# Altium PCB ExchangeDisplay2.PcbDoc (part 1 of 3)
Units mil, origin at the board's own origin, x right, y up, seen from the top; angles counter-clockwise.
Board outline 13550 x 7110 mil, 2 copper layers (Top Layer, Bottom Layer); 256 components, 104 nets, 668 pads, 97 vias.
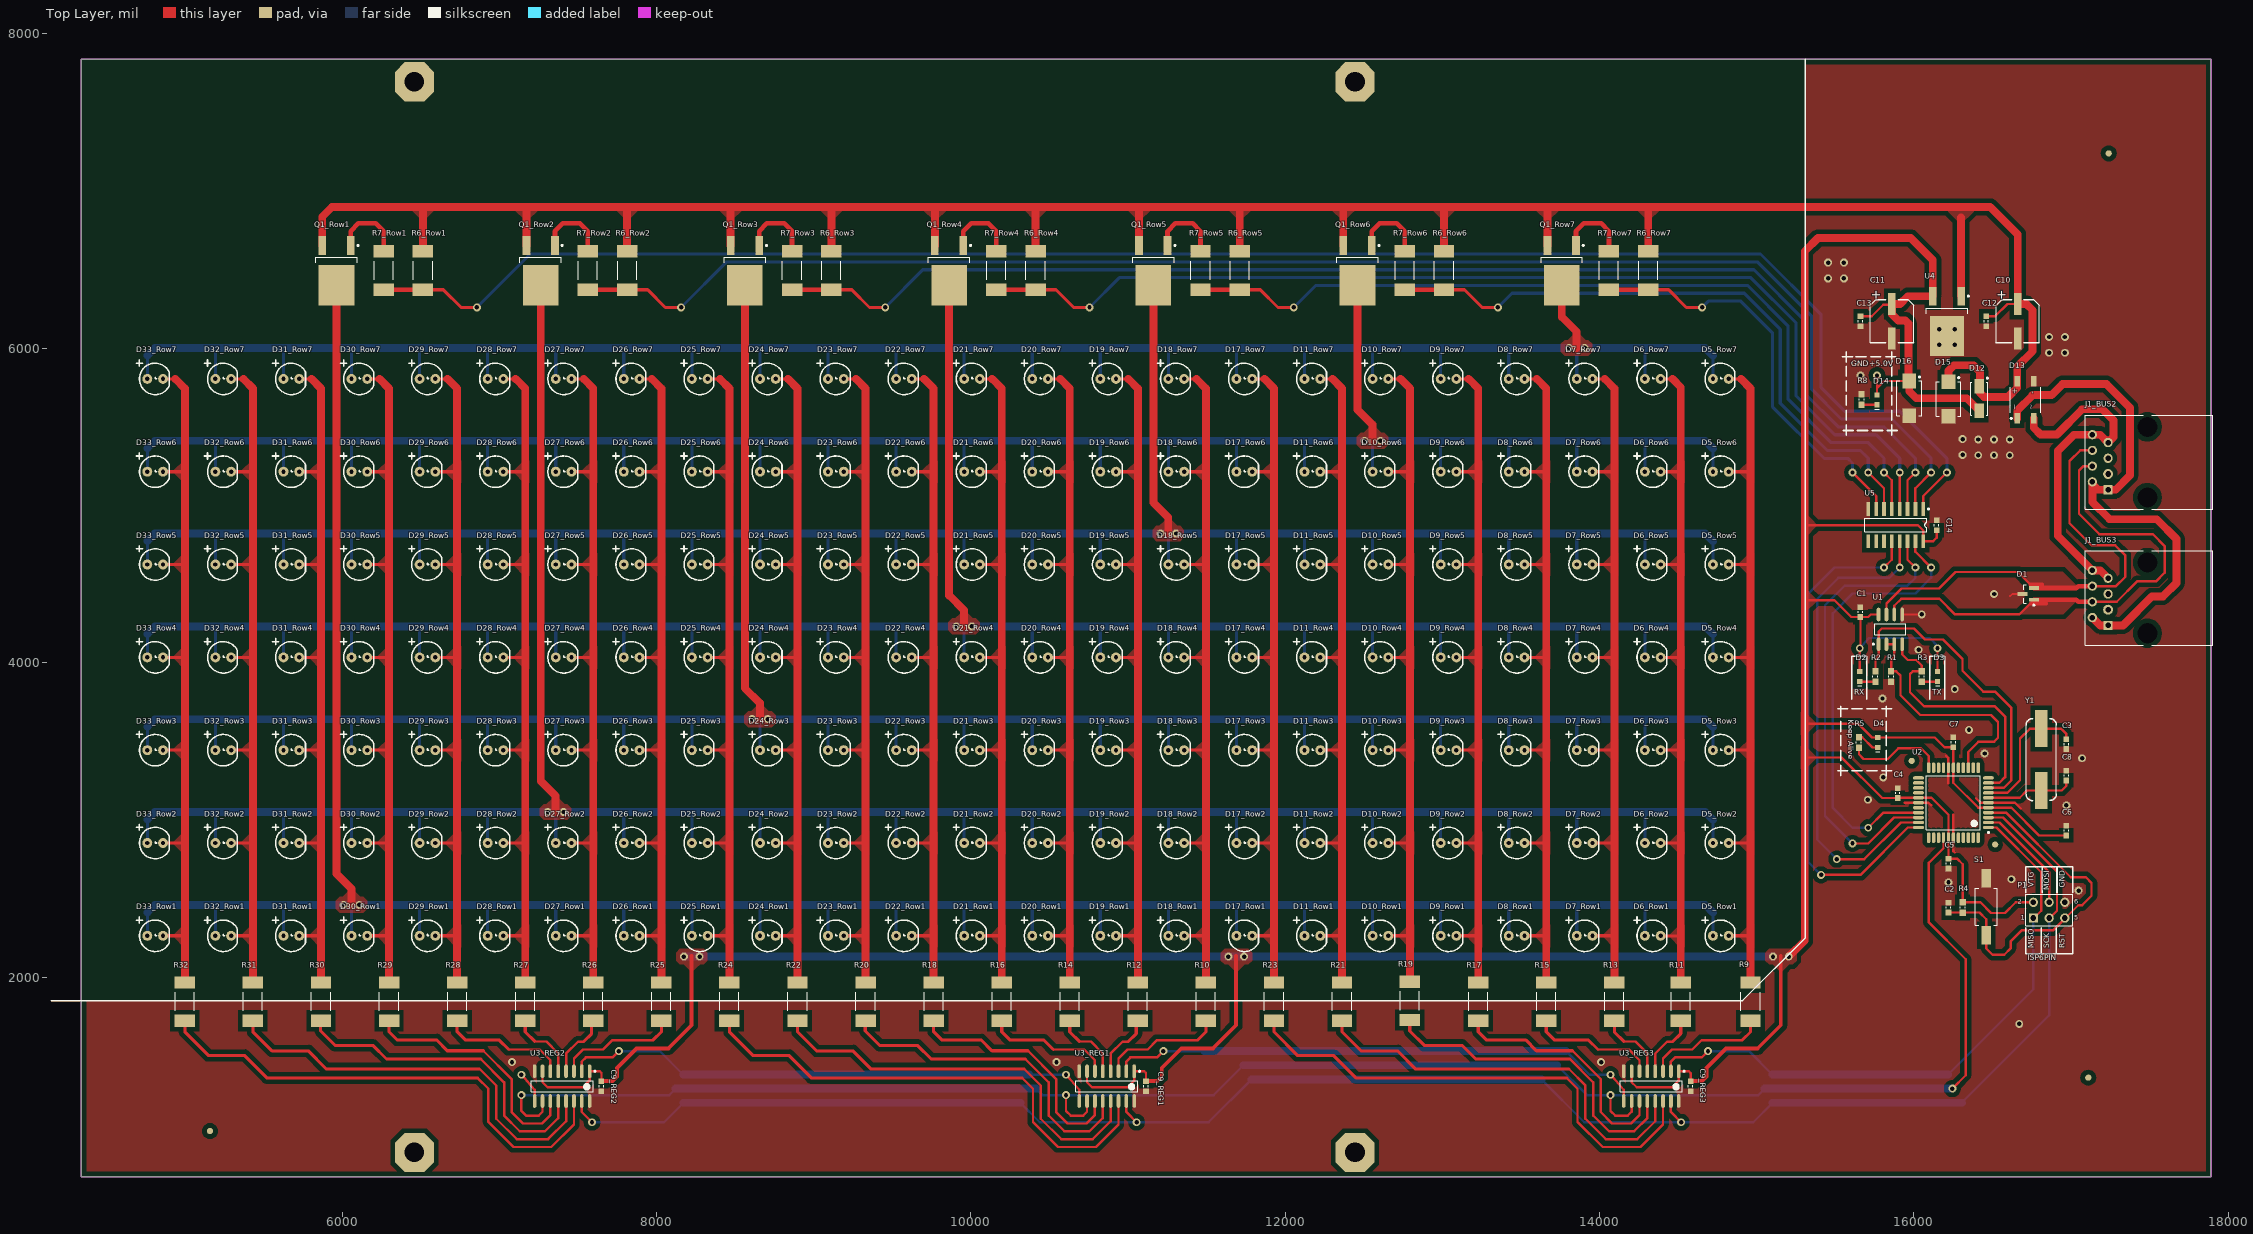
[diagram p0: Top Layer view]
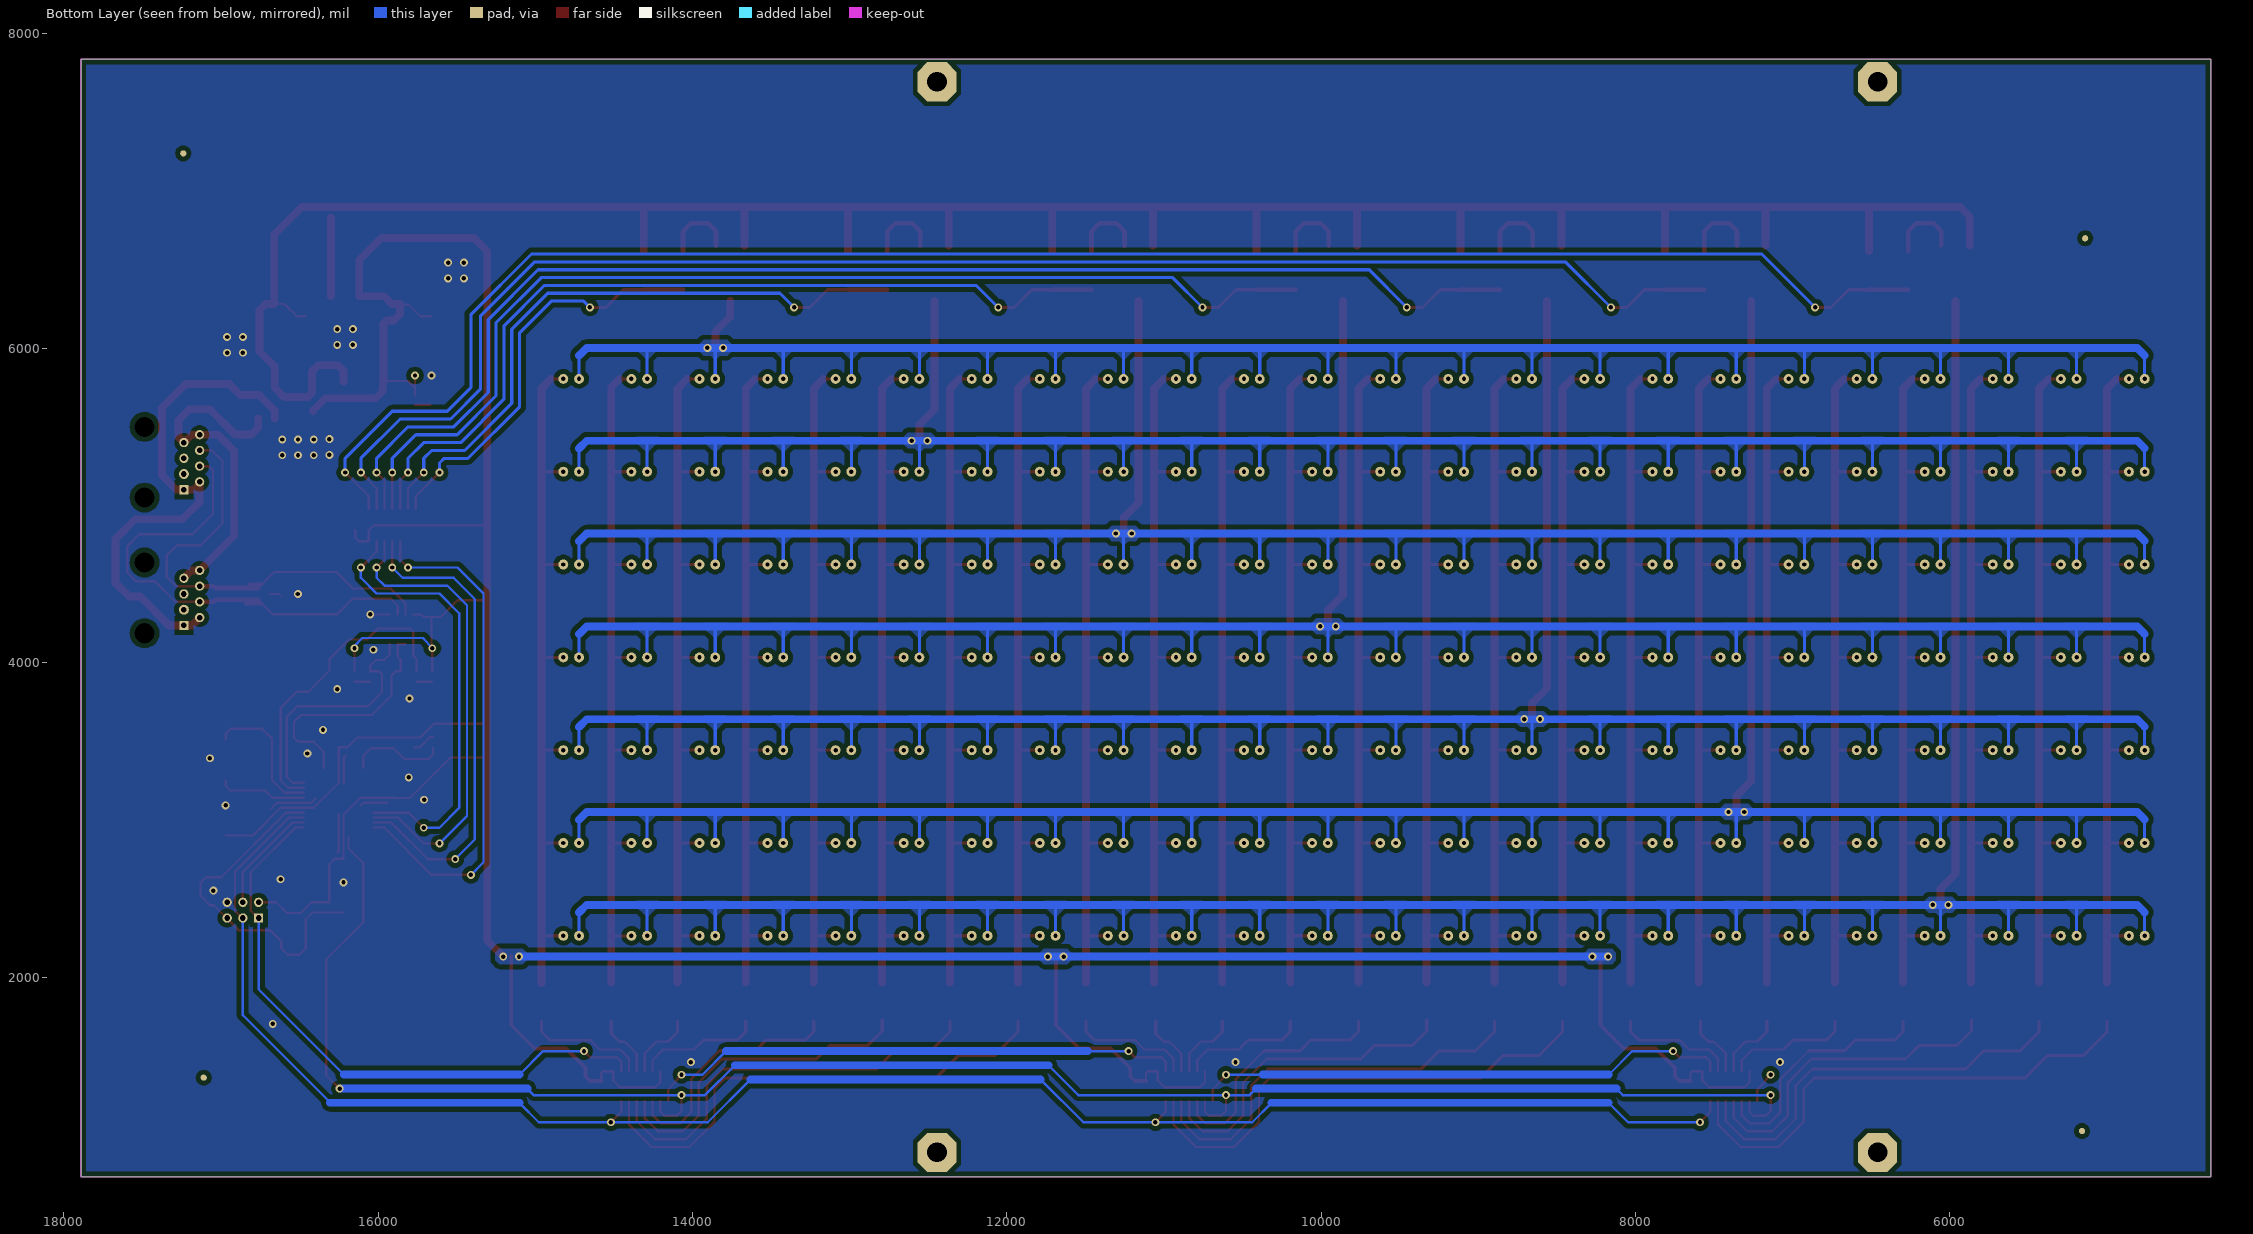
[diagram p1: Bottom Layer view, seen from below]

## Layer stack, top to bottom
Top Layer: signal copper 1.4
Dielectric: dielectric 12.6, FR-4, Dk 4.8
Bottom Layer: signal copper 1.4

## Board outline
17890,730 17890,7840 4340,7840 4340,730

## Design rules (kind name [scope] priority, off if disabled: settings)
Clearance [All] p1: gap=30
ComponentClearance [All] p1: gap=10 collisioncheckmode=3 verticalgap=10
PolygonConnect [All] p1: connectstyle=Direct reliefconductorwidth=10 reliefentries=4 polygonreliefangle="90 Angle"
RoomDefinition SUPPLY [InComponentClass('SUPPLY')] p1: confinementstyle=ConfineIn formatcopy=TRUE lockcomponents=FALSE outline 0,0 2000,0 2000,1000 0,1000
RoomDefinition RowCtrl [InComponentClass('RowCtrl')] p2: confinementstyle=ConfineIn formatcopy=TRUE lockcomponents=FALSE outline 0,0 2000,0 2000,1000 0,1000
RoomDefinition Row7 [InComponentClass('Row7')] p3: confinementstyle=ConfineIn formatcopy=TRUE lockcomponents=FALSE outline 0,0 2000,0 2000,1000 0,1000
RoomDefinition Row6 [InComponentClass('Row6')] p4: confinementstyle=ConfineIn formatcopy=TRUE lockcomponents=FALSE outline 0,0 2000,0 2000,1000 0,1000
RoomDefinition Row5 [InComponentClass('Row5')] p5: confinementstyle=ConfineIn formatcopy=TRUE lockcomponents=FALSE outline 0,0 2000,0 2000,1000 0,1000
RoomDefinition Row4 [InComponentClass('Row4')] p6: confinementstyle=ConfineIn formatcopy=TRUE lockcomponents=FALSE outline 0,0 2000,0 2000,1000 0,1000
RoomDefinition Row3 [InComponentClass('Row3')] p7: confinementstyle=ConfineIn formatcopy=TRUE lockcomponents=FALSE outline 0,0 2000,0 2000,1000 0,1000
RoomDefinition Row2 [InComponentClass('Row2')] p8: confinementstyle=ConfineIn formatcopy=TRUE lockcomponents=FALSE outline 0,0 2000,0 2000,1000 0,1000
RoomDefinition Row1 [InComponentClass('Row1')] p9: confinementstyle=ConfineIn formatcopy=TRUE lockcomponents=FALSE outline 0,0 2000,0 2000,1000 0,1000
RoomDefinition REG3 [InComponentClass('REG3')] p10: confinementstyle=ConfineIn formatcopy=TRUE lockcomponents=FALSE outline 0,0 2000,0 2000,1000 0,1000
RoomDefinition REG2 [InComponentClass('REG2')] p11: confinementstyle=ConfineIn formatcopy=TRUE lockcomponents=FALSE outline 0,0 2000,0 2000,1000 0,1000
RoomDefinition REG1 [InComponentClass('REG1')] p12: confinementstyle=ConfineIn formatcopy=TRUE lockcomponents=FALSE outline 0,0 2000,0 2000,1000 0,1000
RoomDefinition MATRIX [InComponentClass('MATRIX')] p13: confinementstyle=ConfineIn formatcopy=TRUE lockcomponents=FALSE outline 0,0 2000,0 2000,1000 0,1000
RoomDefinition CPU [InComponentClass('CPU')] p14: confinementstyle=ConfineIn formatcopy=TRUE lockcomponents=FALSE outline 0,0 2000,0 2000,1000 0,1000
RoomDefinition COM485 [InComponentClass('COM485')] p15: confinementstyle=ConfineIn formatcopy=TRUE lockcomponents=FALSE outline 0,0 2000,0 2000,1000 0,1000
RoomDefinition BUS3 [InComponentClass('BUS3')] p16: confinementstyle=ConfineIn formatcopy=TRUE lockcomponents=FALSE outline 0,0 2000,0 2000,1000 0,1000
RoomDefinition BUS2 [InComponentClass('BUS2')] p17: confinementstyle=ConfineIn formatcopy=TRUE lockcomponents=FALSE outline 0,0 2000,0 2000,1000 0,1000
RoutingVias [All] p1: holewidth=28 width=50 viastyle="Through Hole" minholewidth=28 minwidth=50 maxholewidth=28 maxwidth=50
SolderMaskExpansion [All] p1: expansion=4
TestPointUsage [All] p1: valid=0 allowmultiple=FALSE
Testpoint [All] p1: side=15 testpointundercomponent=TRUE minsize=40 maxsize=100 preferedsize=60 minholesize=0 maxholesize=40 preferedholesize=32 testpointgrid=1 style=1023 order=0123456789
Width RES [(InNet('RES11') OR InNet('RES12') OR InNet('RES13') OR InNet('RES14') OR InNet('RES15') OR InNet('RES16') OR InNet('RES17') OR InNet('RES18') OR  InNet('RES18'))] p1: maxlimit=50 minlimit=10 preferedwidth=20
Width [All] p2: maxlimit=50 minlimit=10 preferedwidth=15
18 further rules are at their usual default settings.

## Classes and differential pairs
channel class TPIC6B595_CommunicationInterface: REG1 REG2 REG3
channel class RowDotMatrix: Row1 Row2 Row3 Row4 Row5 Row6 Row7
channel class BUSConnector: BUS2 BUS3
component class SUPPLY: C10 C11 C12 C13 D12 D13 D14 D15 D16 R8 U4
component class RowCtrl: C14 U5
component class Row7: D5_Row7 D6_Row7 D7_Row7 D8_Row7 D9_Row7 D10_Row7 D11_Row7 D17_Row7 D18_Row7 D19_Row7 D20_Row7 D21_Row7 D22_Row7 D23_Row7 D24_Row7 D25_Row7 D26_Row7 D27_Row7 D28_Row7 D29_Row7 D30_Row7 D31_Row7 D32_Row7 D33_Row7 Q1_Row7 R6_Row7 R7_Row7
component class Row6: D5_Row6 D6_Row6 D7_Row6 D8_Row6 D9_Row6 D10_Row6 D11_Row6 D17_Row6 D18_Row6 D19_Row6 D20_Row6 D21_Row6 D22_Row6 D23_Row6 D24_Row6 D25_Row6 D26_Row6 D27_Row6 D28_Row6 D29_Row6 D30_Row6 D31_Row6 D32_Row6 D33_Row6 Q1_Row6 R6_Row6 R7_Row6
component class Row5: D5_Row5 D6_Row5 D7_Row5 D8_Row5 D9_Row5 D10_Row5 D11_Row5 D17_Row5 D18_Row5 D19_Row5 D20_Row5 D21_Row5 D22_Row5 D23_Row5 D24_Row5 D25_Row5 D26_Row5 D27_Row5 D28_Row5 D29_Row5 D30_Row5 D31_Row5 D32_Row5 D33_Row5 Q1_Row5 R6_Row5 R7_Row5
component class Row4: D5_Row4 D6_Row4 D7_Row4 D8_Row4 D9_Row4 D10_Row4 D11_Row4 D17_Row4 D18_Row4 D19_Row4 D20_Row4 D21_Row4 D22_Row4 D23_Row4 D24_Row4 D25_Row4 D26_Row4 D27_Row4 D28_Row4 D29_Row4 D30_Row4 D31_Row4 D32_Row4 D33_Row4 Q1_Row4 R6_Row4 R7_Row4
component class Row3: D5_Row3 D6_Row3 D7_Row3 D8_Row3 D9_Row3 D10_Row3 D11_Row3 D17_Row3 D18_Row3 D19_Row3 D20_Row3 D21_Row3 D22_Row3 D23_Row3 D24_Row3 D25_Row3 D26_Row3 D27_Row3 D28_Row3 D29_Row3 D30_Row3 D31_Row3 D32_Row3 D33_Row3 Q1_Row3 R6_Row3 R7_Row3
component class Row2: D5_Row2 D6_Row2 D7_Row2 D8_Row2 D9_Row2 D10_Row2 D11_Row2 D17_Row2 D18_Row2 D19_Row2 D20_Row2 D21_Row2 D22_Row2 D23_Row2 D24_Row2 D25_Row2 D26_Row2 D27_Row2 D28_Row2 D29_Row2 D30_Row2 D31_Row2 D32_Row2 D33_Row2 Q1_Row2 R6_Row2 R7_Row2
component class Row1: D5_Row1 D6_Row1 D7_Row1 D8_Row1 D9_Row1 D10_Row1 D11_Row1 D17_Row1 D18_Row1 D19_Row1 D20_Row1 D21_Row1 D22_Row1 D23_Row1 D24_Row1 D25_Row1 D26_Row1 D27_Row1 D28_Row1 D29_Row1 D30_Row1 D31_Row1 D32_Row1 D33_Row1 Q1_Row1 R6_Row1 R7_Row1
component class MATRIX: R9 R10 R11 R12 R13 R14 R15 R16 R17 R18 R19 R20 R21 R22 R23 R24 R25 R26 R27 R28 R29 R30 R31 R32
component class CPU: C2 C3 C4 C5 C6 C7 C8 D4 P1 R4 R5 S1 U2 Y1
component class COM485: C1 D1 D2 D3 R1 R2 R3 U1
component class BUS3: J1_BUS3
component class BUS2: J1_BUS2
component class REG1: C9_REG1 U3_REG1
component class REG2: C9_REG2 U3_REG2
component class REG3: C9_REG3 U3_REG3

## Components (designator, comment, footprint, x,y, rotation, side; value= is the part's Value field where it differs from the comment)
C1 "CAP0.1uF" CAP0603 15660,4322.05 r90 top
C2 "CAP0.1uF" CAP0603 16220.71,2442.05 r90 top
C3 "CAP18pF" CAP0603 16970.71,3482.05 r270 top
C4 "CAP0.1uF" CAP0603 15897.64,3170.67 r90 top
C5 "CAP0.1uF" CAP0603 16220.71,2722.05 r270 top
C6 "CAP0.1uF" CAP0603 16970.71,2932.05 r90 top
C7 "CAP0.1uF" CAP0603 16251.81,3493.54 r90 top
C8 "CAP18pF" CAP0603 16970.71,3282.05 r90 top
C9_REG1 "CAP0.1uF" CAP0603 11115.04,1305.99 r270 top (schematic designator C9)
C9_REG2 "CAP0.1uF" CAP0603 7650.47,1305.99 r270 top (schematic designator C9)
C9_REG3 "CAP0.1uF" CAP0603 14579.61,1305.98 r270 top (schematic designator C9)
C10 "CAP100uF" EEH-ZA1E101XP 16660.71,6172.05 r270 top
C11 "CAP47uF" EEH-ZA1E101XP 15860.71,6172.05 r270 top
C12 "CAP0.1uF" CAP0603 16460.71,6172.05 r270 top
C13 "CAP0.1uF" CAP0603 15660.71,6172.05 r270 top
C14 "CAP0.1uF" CAP0603 16145,4875 r90 top
D1 "SM712-02HTG" SW712 16727.87,4437.05 r180 top
D2 "LEDY" 150060YS75000 15655.71,3912.05 r90 top
D3 "LEDY" 150060YS75000 16150.71,3912.05 r90 top
D4 "LEDY" 150060YS75000 15770.71,3492.05 r90 top
D5_Row1 "Oval Led" LED 14722,2262.21 r0 top (schematic designator D5)
D5_Row2 "Oval Led" LED 14722,2852.76 r0 top (schematic designator D5)
D5_Row3 "Oval Led" LED 14722,3443.31 r0 top (schematic designator D5)
D5_Row4 "Oval Led" LED 14722,4033.86 r0 top (schematic designator D5)
D5_Row5 "Oval Led" LED 14722,4624.41 r0 top (schematic designator D5)
D5_Row6 "Oval Led" LED 14722.01,5214.96 r0 top (schematic designator D5)
D5_Row7 "Oval Led" LED 14722.01,5805.51 r0 top (schematic designator D5)
D6_Row1 "Oval Led" LED 14288.93,2262.21 r0 top (schematic designator D6)
D6_Row2 "Oval Led" LED 14288.93,2852.76 r0 top (schematic designator D6)
D6_Row3 "Oval Led" LED 14288.93,3443.31 r0 top (schematic designator D6)
D6_Row4 "Oval Led" LED 14288.93,4033.86 r0 top (schematic designator D6)
D6_Row5 "Oval Led" LED 14288.93,4624.41 r0 top (schematic designator D6)
D6_Row6 "Oval Led" LED 14288.93,5214.96 r0 top (schematic designator D6)
D6_Row7 "Oval Led" LED 14288.93,5805.51 r0 top (schematic designator D6)
D7_Row1 "Oval Led" LED 13855.86,2262.21 r0 top (schematic designator D7)
D7_Row2 "Oval Led" LED 13855.86,2852.76 r0 top (schematic designator D7)
D7_Row3 "Oval Led" LED 13855.86,3443.31 r0 top (schematic designator D7)
D7_Row4 "Oval Led" LED 13855.86,4033.86 r0 top (schematic designator D7)
D7_Row5 "Oval Led" LED 13855.86,4624.41 r0 top (schematic designator D7)
D7_Row6 "Oval Led" LED 13855.86,5214.96 r0 top (schematic designator D7)
D7_Row7 "Oval Led" LED 13855.86,5805.51 r0 top (schematic designator D7)
D8_Row1 "Oval Led" LED 13422.79,2262.21 r0 top (schematic designator D8)
D8_Row2 "Oval Led" LED 13422.79,2852.76 r0 top (schematic designator D8)
D8_Row3 "Oval Led" LED 13422.79,3443.31 r0 top (schematic designator D8)
D8_Row4 "Oval Led" LED 13422.79,4033.86 r0 top (schematic designator D8)
D8_Row5 "Oval Led" LED 13422.79,4624.41 r0 top (schematic designator D8)
D8_Row6 "Oval Led" LED 13422.8,5214.96 r0 top (schematic designator D8)
D8_Row7 "Oval Led" LED 13422.79,5805.51 r0 top (schematic designator D8)
D9_Row1 "Oval Led" LED 12989.72,2262.21 r0 top (schematic designator D9)
D9_Row2 "Oval Led" LED 12989.72,2852.76 r0 top (schematic designator D9)
D9_Row3 "Oval Led" LED 12989.72,3443.31 r0 top (schematic designator D9)
D9_Row4 "Oval Led" LED 12989.72,4033.86 r0 top (schematic designator D9)
D9_Row5 "Oval Led" LED 12989.72,4624.41 r0 top (schematic designator D9)
D9_Row6 "Oval Led" LED 12989.72,5214.96 r0 top (schematic designator D9)
D9_Row7 "Oval Led" LED 12989.72,5805.51 r0 top (schematic designator D9)
D10_Row1 "Oval Led" LED 12556.65,2262.21 r0 top (schematic designator D10)
D10_Row2 "Oval Led" LED 12556.65,2852.76 r0 top (schematic designator D10)
D10_Row3 "Oval Led" LED 12556.65,3443.31 r0 top (schematic designator D10)
D10_Row4 "Oval Led" LED 12556.65,4033.86 r0 top (schematic designator D10)
D10_Row5 "Oval Led" LED 12556.65,4624.41 r0 top (schematic designator D10)
D10_Row6 "Oval Led" LED 12556.65,5214.96 r0 top (schematic designator D10)
D10_Row7 "Oval Led" LED 12556.65,5805.51 r0 top (schematic designator D10)
D11_Row1 "Oval Led" LED 12123.57,2262.21 r0 top (schematic designator D11)
D11_Row2 "Oval Led" LED 12123.57,2852.76 r0 top (schematic designator D11)
D11_Row3 "Oval Led" LED 12123.57,3443.31 r0 top (schematic designator D11)
D11_Row4 "Oval Led" LED 12123.57,4033.86 r0 top (schematic designator D11)
D11_Row5 "Oval Led" LED 12123.57,4624.41 r0 top (schematic designator D11)
D11_Row6 "Oval Led" LED 12123.57,5214.96 r0 top (schematic designator D11)
D11_Row7 "Oval Led" LED 12123.57,5805.51 r0 top (schematic designator D11)
D12 "S1M-E3/5AT" S1M-E3/5AT 16415.71,5679.8 r270 top
D13 "MB6S-E3/80" MB6S-E3/80 16710.71,5672.05 r90 top
D14 "LEDY" 150060YS75000 15765.71,5672.05 r90 top
D15 "TVS12V" SMBJ5.0A 16220.71,5677.05 r270 top
D16 "TVS5.0V" SMBJ5.0A 15970.71,5681.81 r270 top
D17_Row1 "Oval Led" LED 11690.5,2262.21 r0 top (schematic designator D17)
D17_Row2 "Oval Led" LED 11690.5,2852.76 r0 top (schematic designator D17)
D17_Row3 "Oval Led" LED 11690.5,3443.31 r0 top (schematic designator D17)
D17_Row4 "Oval Led" LED 11690.5,4033.86 r0 top (schematic designator D17)
D17_Row5 "Oval Led" LED 11690.5,4624.41 r0 top (schematic designator D17)
D17_Row6 "Oval Led" LED 11690.5,5214.96 r0 top (schematic designator D17)
D17_Row7 "Oval Led" LED 11690.5,5805.51 r0 top (schematic designator D17)
D18_Row1 "Oval Led" LED 11257.43,2262.21 r0 top (schematic designator D18)
D18_Row2 "Oval Led" LED 11257.43,2852.76 r0 top (schematic designator D18)
D18_Row3 "Oval Led" LED 11257.43,3443.31 r0 top (schematic designator D18)
D18_Row4 "Oval Led" LED 11257.43,4033.86 r0 top (schematic designator D18)
D18_Row5 "Oval Led" LED 11257.43,4624.41 r0 top (schematic designator D18)
D18_Row6 "Oval Led" LED 11257.43,5214.96 r0 top (schematic designator D18)
D18_Row7 "Oval Led" LED 11257.43,5805.51 r0 top (schematic designator D18)
D19_Row1 "Oval Led" LED 10824.36,2262.21 r0 top (schematic designator D19)
D19_Row2 "Oval Led" LED 10824.36,2852.76 r0 top (schematic designator D19)
D19_Row3 "Oval Led" LED 10824.36,3443.31 r0 top (schematic designator D19)
D19_Row4 "Oval Led" LED 10824.36,4033.86 r0 top (schematic designator D19)
D19_Row5 "Oval Led" LED 10824.36,4624.41 r0 top (schematic designator D19)
D19_Row6 "Oval Led" LED 10824.36,5214.96 r0 top (schematic designator D19)
D19_Row7 "Oval Led" LED 10824.36,5805.51 r0 top (schematic designator D19)
D20_Row1 "Oval Led" LED 10391.29,2262.21 r0 top (schematic designator D20)
D20_Row2 "Oval Led" LED 10391.29,2852.76 r0 top (schematic designator D20)
D20_Row3 "Oval Led" LED 10391.29,3443.31 r0 top (schematic designator D20)
D20_Row4 "Oval Led" LED 10391.29,4033.86 r0 top (schematic designator D20)
D20_Row5 "Oval Led" LED 10391.29,4624.41 r0 top (schematic designator D20)
D20_Row6 "Oval Led" LED 10391.29,5214.96 r0 top (schematic designator D20)
D20_Row7 "Oval Led" LED 10391.29,5805.51 r0 top (schematic designator D20)
D21_Row1 "Oval Led" LED 9958.22,2262.21 r0 top (schematic designator D21)
D21_Row2 "Oval Led" LED 9958.22,2852.76 r0 top (schematic designator D21)
D21_Row3 "Oval Led" LED 9958.22,3443.31 r0 top (schematic designator D21)
D21_Row4 "Oval Led" LED 9958.22,4033.86 r0 top (schematic designator D21)
D21_Row5 "Oval Led" LED 9958.22,4624.41 r0 top (schematic designator D21)
D21_Row6 "Oval Led" LED 9958.22,5214.96 r0 top (schematic designator D21)
D21_Row7 "Oval Led" LED 9958.22,5805.51 r0 top (schematic designator D21)
D22_Row1 "Oval Led" LED 9525.15,2262.21 r0 top (schematic designator D22)
D22_Row2 "Oval Led" LED 9525.15,2852.76 r0 top (schematic designator D22)
D22_Row3 "Oval Led" LED 9525.15,3443.31 r0 top (schematic designator D22)
D22_Row4 "Oval Led" LED 9525.15,4033.86 r0 top (schematic designator D22)
D22_Row5 "Oval Led" LED 9525.15,4624.41 r0 top (schematic designator D22)
D22_Row6 "Oval Led" LED 9525.15,5214.96 r0 top (schematic designator D22)
D22_Row7 "Oval Led" LED 9525.15,5805.51 r0 top (schematic designator D22)
D23_Row1 "Oval Led" LED 9092.08,2262.21 r0 top (schematic designator D23)
D23_Row2 "Oval Led" LED 9092.08,2852.76 r0 top (schematic designator D23)
D23_Row3 "Oval Led" LED 9092.08,3443.31 r0 top (schematic designator D23)
D23_Row4 "Oval Led" LED 9092.08,4033.86 r0 top (schematic designator D23)
D23_Row5 "Oval Led" LED 9092.08,4624.41 r0 top (schematic designator D23)
D23_Row6 "Oval Led" LED 9092.08,5214.96 r0 top (schematic designator D23)
D23_Row7 "Oval Led" LED 9092.08,5805.51 r0 top (schematic designator D23)
D24_Row1 "Oval Led" LED 8659.01,2262.21 r0 top (schematic designator D24)
D24_Row2 "Oval Led" LED 8659.01,2852.76 r0 top (schematic designator D24)
D24_Row3 "Oval Led" LED 8659.01,3443.31 r0 top (schematic designator D24)
D24_Row4 "Oval Led" LED 8659.01,4033.86 r0 top (schematic designator D24)
D24_Row5 "Oval Led" LED 8659.01,4624.41 r0 top (schematic designator D24)
D24_Row6 "Oval Led" LED 8659.01,5214.96 r0 top (schematic designator D24)
D24_Row7 "Oval Led" LED 8659.01,5805.51 r0 top (schematic designator D24)
D25_Row1 "Oval Led" LED 8225.94,2262.21 r0 top (schematic designator D25)
D25_Row2 "Oval Led" LED 8225.94,2852.76 r0 top (schematic designator D25)
D25_Row3 "Oval Led" LED 8225.94,3443.31 r0 top (schematic designator D25)
D25_Row4 "Oval Led" LED 8225.94,4033.86 r0 top (schematic designator D25)
D25_Row5 "Oval Led" LED 8225.94,4624.41 r0 top (schematic designator D25)
D25_Row6 "Oval Led" LED 8225.94,5214.96 r0 top (schematic designator D25)
D25_Row7 "Oval Led" LED 8225.94,5805.51 r0 top (schematic designator D25)
D26_Row1 "Oval Led" LED 7792.87,2262.21 r0 top (schematic designator D26)
D26_Row2 "Oval Led" LED 7792.87,2852.76 r0 top (schematic designator D26)
D26_Row3 "Oval Led" LED 7792.87,3443.31 r0 top (schematic designator D26)
D26_Row4 "Oval Led" LED 7792.87,4033.86 r0 top (schematic designator D26)
D26_Row5 "Oval Led" LED 7792.87,4624.41 r0 top (schematic designator D26)
D26_Row6 "Oval Led" LED 7792.87,5214.96 r0 top (schematic designator D26)
D26_Row7 "Oval Led" LED 7792.87,5805.51 r0 top (schematic designator D26)
D27_Row1 "Oval Led" LED 7359.8,2262.21 r0 top (schematic designator D27)
D27_Row2 "Oval Led" LED 7359.8,2852.76 r0 top (schematic designator D27)
D27_Row3 "Oval Led" LED 7359.8,3443.31 r0 top (schematic designator D27)
D27_Row4 "Oval Led" LED 7359.8,4033.86 r0 top (schematic designator D27)
D27_Row5 "Oval Led" LED 7359.8,4624.41 r0 top (schematic designator D27)
D27_Row6 "Oval Led" LED 7359.8,5214.96 r0 top (schematic designator D27)
D27_Row7 "Oval Led" LED 7359.8,5805.51 r0 top (schematic designator D27)
D28_Row1 "Oval Led" LED 6926.72,2262.21 r0 top (schematic designator D28)
D28_Row2 "Oval Led" LED 6926.72,2852.76 r0 top (schematic designator D28)
D28_Row3 "Oval Led" LED 6926.72,3443.31 r0 top (schematic designator D28)
D28_Row4 "Oval Led" LED 6926.72,4033.86 r0 top (schematic designator D28)
D28_Row5 "Oval Led" LED 6926.72,4624.41 r0 top (schematic designator D28)
D28_Row6 "Oval Led" LED 6926.72,5214.96 r0 top (schematic designator D28)
D28_Row7 "Oval Led" LED 6926.72,5805.51 r0 top (schematic designator D28)
D29_Row1 "Oval Led" LED 6493.65,2262.21 r0 top (schematic designator D29)
D29_Row2 "Oval Led" LED 6493.65,2852.76 r0 top (schematic designator D29)
D29_Row3 "Oval Led" LED 6493.65,3443.31 r0 top (schematic designator D29)
D29_Row4 "Oval Led" LED 6493.65,4033.86 r0 top (schematic designator D29)
D29_Row5 "Oval Led" LED 6493.65,4624.41 r0 top (schematic designator D29)
D29_Row6 "Oval Led" LED 6493.65,5214.96 r0 top (schematic designator D29)
D29_Row7 "Oval Led" LED 6493.65,5805.51 r0 top (schematic designator D29)
D30_Row1 "Oval Led" LED 6060.58,2262.21 r0 top (schematic designator D30)
D30_Row2 "Oval Led" LED 6060.58,2852.76 r0 top (schematic designator D30)
D30_Row3 "Oval Led" LED 6060.58,3443.31 r0 top (schematic designator D30)
D30_Row4 "Oval Led" LED 6060.58,4033.86 r0 top (schematic designator D30)
D30_Row5 "Oval Led" LED 6060.58,4624.41 r0 top (schematic designator D30)
D30_Row6 "Oval Led" LED 6060.58,5214.96 r0 top (schematic designator D30)
D30_Row7 "Oval Led" LED 6060.58,5805.51 r0 top (schematic designator D30)
D31_Row1 "Oval Led" LED 5627.51,2262.21 r0 top (schematic designator D31)
D31_Row2 "Oval Led" LED 5627.51,2852.76 r0 top (schematic designator D31)
D31_Row3 "Oval Led" LED 5627.51,3443.31 r0 top (schematic designator D31)
D31_Row4 "Oval Led" LED 5627.51,4033.86 r0 top (schematic designator D31)
D31_Row5 "Oval Led" LED 5627.51,4624.41 r0 top (schematic designator D31)
D31_Row6 "Oval Led" LED 5627.51,5214.96 r0 top (schematic designator D31)
D31_Row7 "Oval Led" LED 5627.51,5805.51 r0 top (schematic designator D31)
D32_Row1 "Oval Led" LED 5194.44,2262.21 r0 top (schematic designator D32)
D32_Row2 "Oval Led" LED 5194.44,2852.76 r0 top (schematic designator D32)
D32_Row3 "Oval Led" LED 5194.44,3443.31 r0 top (schematic designator D32)
D32_Row4 "Oval Led" LED 5194.44,4033.86 r0 top (schematic designator D32)
D32_Row5 "Oval Led" LED 5194.44,4624.41 r0 top (schematic designator D32)
D32_Row6 "Oval Led" LED 5194.44,5214.96 r0 top (schematic designator D32)
D32_Row7 "Oval Led" LED 5194.44,5805.51 r0 top (schematic designator D32)
D33_Row1 "Oval Led" LED 4761.37,2262.21 r0 top (schematic designator D33)
D33_Row2 "Oval Led" LED 4761.37,2852.76 r0 top (schematic designator D33)
D33_Row3 "Oval Led" LED 4761.37,3443.31 r0 top (schematic designator D33)
D33_Row4 "Oval Led" LED 4761.37,4033.86 r0 top (schematic designator D33)
D33_Row5 "Oval Led" LED 4761.37,4624.41 r0 top (schematic designator D33)
D33_Row6 "Oval Led" LED 4761.37,5214.96 r0 top (schematic designator D33)
D33_Row7 "Oval Led" LED 4761.37,5805.51 r0 top (schematic designator D33)
J1_BUS2 "RJ45" 15-43-6233 17900.71,5275.43 r90 top (schematic designator J1)
J1_BUS3 "RJ45" 15-43-6233 17900.67,4412.05 r90 top (schematic designator J1)
P1 "ISP" HDR2X3 16760.71,2375.51 r0 top
Q1_Row1 "MJD117" MJD117 5964.72,6495 r270 top (schematic designator Q1)
Q1_Row2 "MJD117" MJD117 7263.94,6495 r270 top (schematic designator Q1)
Q1_Row3 "MJD117" MJD117 8563.15,6495 r270 top (schematic designator Q1)
Q1_Row4 "MJD117" MJD117 9862.36,6495 r270 top (schematic designator Q1)
Q1_Row5 "MJD117" MJD117 11161.57,6495 r270 top (schematic designator Q1)
Q1_Row6 "MJD117" MJD117 12460.79,6495 r270 top (schematic designator Q1)
Q1_Row7 "MJD117" MJD117 13760,6495 r270 top (schematic designator Q1)
R1 "RES4.7K" RES0603 15855.71,3912.05 r270 top
R2 "RES4.7K" RES0603 15755.71,3912.05 r90 top
R3 "RES4.7K" RES0603 16050.71,3912.05 r90 top
R4 "RES4.7K" RES0603 16310.71,2442.05 r90 top
R5 "RES4.7K" RES0603 15650.71,3492.05 r90 top
R6_Row1 "RES470" RES2512 6514.72,6495 r270 top (schematic designator R6)
R6_Row2 "RES470" RES2512 7813.94,6495 r270 top (schematic designator R6)
R6_Row3 "RES470" RES2512 9113.15,6495 r270 top (schematic designator R6)
R6_Row4 "RES470" RES2512 10412.36,6495 r270 top (schematic designator R6)
R6_Row5 "RES470" RES2512 11711.57,6495 r270 top (schematic designator R6)
R6_Row6 "RES470" RES2512 13010.79,6495 r270 top (schematic designator R6)
R6_Row7 "RES470" RES2512 14310,6495 r270 top (schematic designator R6)
R7_Row1 "RES470" RES2512 6264.72,6495 r90 top (schematic designator R7)
R7_Row2 "RES470" RES2512 7563.94,6495 r90 top (schematic designator R7)
R7_Row3 "RES470" RES2512 8863.15,6495 r90 top (schematic designator R7)
R7_Row4 "RES470" RES2512 10162.36,6495 r90 top (schematic designator R7)
R7_Row5 "RES470" RES2512 11461.57,6495 r90 top (schematic designator R7)
R7_Row6 "RES470" RES2512 12760.79,6495 r90 top (schematic designator R7)
R7_Row7 "RES470" RES2512 14060,6495 r90 top (schematic designator R7)
R8 "RES4.7K" RES0603 15667.68,5674.01 r90 top
R9 "RES470" RES2512 14960.63,1843.46 r270 top
R10 "RES470" RES2512 11496.06,1843.47 r270 top
R11 "RES470" RES2512 14517.4,1843.39 r270 top
R12 "RES470" RES2512 11062.99,1843.47 r270 top
R13 "RES470" RES2512 14094.49,1843.47 r270 top
R14 "RES470" RES2512 10629.92,1843.47 r270 top
R15 "RES470" RES2512 13661.42,1843.47 r270 top
R16 "RES470" RES2512 10196.85,1843.47 r270 top
R17 "RES470" RES2512 13228.35,1843.47 r270 top
R18 "RES470" RES2512 9763.78,1843.47 r270 top
R19 "RES470" RES2512 12793.15,1848.98 r270 top
R20 "RES470" RES2512 9330.71,1843.47 r270 top
R21 "RES470" RES2512 12362.2,1843.47 r270 top
R22 "RES470" RES2512 8897.64,1843.47 r270 top
R23 "RES470" RES2512 11929.13,1843.47 r270 top
R24 "RES470" RES2512 8464.57,1843.47 r270 top
R25 "RES470" RES2512 8031.5,1843.47 r270 top
R26 "RES470" RES2512 7598.42,1843.47 r270 top
R27 "RES470" RES2512 7165.35,1843.47 r270 top
R28 "RES470" RES2512 6732.28,1843.47 r270 top
R29 "RES470" RES2512 6299.21,1843.47 r270 top
R30 "RES470" RES2512 5866.14,1843.47 r270 top
R31 "RES470" RES2512 5433.07,1843.47 r270 top
R32 "RES470" RES2512 5000,1843.47 r270 top
S1 "SW-PB" microswitch 16460.71,2447.76 r90 top
U1 "MAX485CSA" NSO8_N 15850.71,4212.05 r90 top
U2 "ATmega1284P-AU" 44A_N 16251.81,3109.1 r180 top
U3_REG1 "POWER SHIFT REG" NPIC6C595_Q100_SOIC16 10865.04,1305.99 r270 top (schematic designator U3)
U3_REG2 "POWER SHIFT REG" NPIC6C595_Q100_SOIC16 7400.47,1305.99 r270 top (schematic designator U3)
U3_REG3 "POWER SHIFT REG" NPIC6C595_Q100_SOIC16 14329.61,1305.98 r270 top (schematic designator U3)
U4 "MC7805CDTRKG" MC7805CDTRKG 16210.71,6172.05 r270 top
U5 "SN74LS145DR" SOIC16 15885,4875 r180 top
Y1 "XTAL" Crystal20MHz 16810.71,3383.9 r90 top

## Footprints (in the part's own frame and the unit in brackets; to place one, negate y for a bottom-side part, rotate by r counter-clockwise, add the part's x,y. Pads: shape width x height; smd on the part's side, far side on the other; paste and mask are expansions set on the pad)
15-43-6233 [mm] "Connector; PCB Jack, Thru-Hole; 1-Port; Unshielded without Lightpipes; Right Angle"
  rect 1.5x1.5 hole 0.9: 1(-4.445,16.89)
  round 1.5 hole 0.9: 2(-3.175,19.43) 4(-0.635,19.43) 5(0.635,16.89) 6(1.905,19.43) 7(3.175,16.89) 8(4.445,19.43)
  round 1.6 hole 0.9: 3(-1.905,16.89)
  round 2.95 hole 3.25 unplated: MH1(-5.715,10.54) MH2(5.715,10.54)
  silkscreen extent -7.62,0 7.62,20.58
44A_N [mm] "Thin QFP, 44-Leads, Body 10x10mm, Pitch 0.8mm, IPC Medium Density"
  oval 1.75x0.55 smd: 1(-5.65,4) 2(-5.65,3.2) 3(-5.65,2.4) 4(-5.65,1.6) 5(-5.65,0.8) 6(-5.65,0) 7(-5.65,-0.8) 8(-5.65,-1.6) 9(-5.65,-2.4) 10(-5.65,-3.2) 11(-5.65,-4) 23(5.65,-4) 24(5.65,-3.2) 25(5.65,-2.4) 26(5.65,-1.6) 27(5.65,-0.8) 28(5.65,0) 29(5.65,0.8) 30(5.65,1.6) 31(5.65,2.4) 32(5.65,3.2) 33(5.65,4)
  oval 0.55x1.75 smd: 12(-4,-5.65) 13(-3.2,-5.65) 14(-2.4,-5.65) 15(-1.6,-5.65) 16(-0.8,-5.65) 17(0,-5.65) 18(0.8,-5.65) 19(1.6,-5.65) 20(2.4,-5.65) 21(3.2,-5.65) 22(4,-5.65) 34(4,5.65) 35(3.2,5.65) 36(2.4,5.65) 37(1.6,5.65) 38(0.8,5.65) 39(0,5.65) 40(-0.8,5.65) 41(-1.6,5.65) 42(-2.4,5.65) 43(-3.2,5.65) 44(-4,5.65)
  silkscreen extent -5.77,-4.35 4.35,4.95, body extent -5,-5 5,5, height 1.2
150060YS75000 [mm]
  rect 0.85x0.85 smd: 1(-0.8,0) 2(0.8,0)
  silkscreen extent -1.53,-0.33 -1.53,0.33, body extent -0.85,-0.45 0.85,0.45, height 2.44
CAP0603 [mm] "Capacitores cerámicos de capas múltiples (MLCC) - SMD/SMT 0603 0.1uF 16volts X7R 5%"
  rect 0.9x0.9 smd: 1(-0.8,0) 2(0.8,0)
  silkscreen extent -0.15,-0.35 0.15,0.35, body extent -0.83,-0.43 0.82,0.42, height 0.85
Crystal20MHz [mm]
  rect 6x2 smd: 1(-5,0) 2(5,0)
  silkscreen extent -6.64,-2.45 6.6,2.45, body extent -6.6,-2.4 6.6,2.4, height 4.3
EEH-ZA1E101XP [mm] "EEH-ZA1E101XP"
  rect 3.5x1.2 smd: 1(-2.794,0) 2(2.794,0)
  silkscreen extent -3.5,-3.5 3.5,3.5
HDR2X3 [mm] "Connector; Header; 3x2 Position"
  rect 1.5x1.5 hole 0.9: 1(0,0)
  round 1.5 hole 0.9: 2(0,2.54) 3(2.54,0) 4(2.54,2.54) 5(5.08,0) 6(5.08,2.54)
  silkscreen extent -1.27,-1.27 6.35,3.81
LED [mm]
  round 1.6 hole 0.711: A(0,0) K(2.54,0)
  silkscreen extent -1.78,-2.54 3.56,3.05
MB6S-E3/80 [mm] "MB6S-E3/80"
  rect 1.7x0.85 smd: 1(-3,1.335) 2(-3,-1.335) 3(3,-1.335) 4(3,1.335)
  silkscreen extent -3.12,-2.45 2.05,2.45, body extent -2.05,-2.47 2.05,2.48, height 2.9
MC7805CDTRKG [mm] "MC7805CDTRKG"
  rect 3.05x1.25 smd: 1(-4.05,2.29) 3(-4.05,-2.29)
  rect 6.5x5.55 smd: 4(2.4,0)
  silkscreen extent -4.17,-3.35 -1.25,3.59, body extent -2.5,-3.37 3.72,3.37, height 2.38
microswitch [mm]
  rect 3x1.6 smd: 1(-4.59,0) 2(4.59,0)
  silkscreen extent -3,-1.75 3,1.75, body extent -3,-1.75 3,1.75, height 4.57
MJD117 [mm]
  rect 3.05x1.25 smd: 1(-4.05,2.3) 3(-4.05,-2.3)
  rect 6.5x5.75 smd: 2(2.4,0)
  silkscreen extent -4.17,-3.35 -1.25,3.6, body extent -2.5,-3.37 3.72,3.37, height 2.38
NPIC6C595_Q100_SOIC16 [mm]
  oval 2.2x0.6 smd: 1(-2.4,4.445) 2(-2.4,3.175) 3(-2.4,1.905) 4(-2.4,0.635) 5(-2.4,-0.635) 6(-2.4,-1.905) 7(-2.4,-3.175) 8(-2.4,-4.445) 9(2.4,-4.445) 10(2.4,-3.175) 11(2.4,-1.905) 12(2.4,-0.635) 13(2.4,0.635) 14(2.4,1.905) 15(2.4,3.175) 16(2.4,4.445)
  silkscreen extent -2.52,-5 0.9,5.42, body extent -2,-5 2,5, height 1.75
NSO8_N [mm] "SOIC, 8-Leads, Body 4.9x3.9mm, Pitch 1.27mm, IPC Medium Density"
  oval 2.2x0.6 smd: 1(-2.4,1.905) 2(-2.4,0.635) 3(-2.4,-0.635) 4(-2.4,-1.905) 5(2.4,-1.905) 6(2.4,-0.635) 7(2.4,0.635) 8(2.4,1.905)
  silkscreen extent -2.52,-2.5 0.9,2.88, body extent -1.95,-2.45 1.95,2.45, height 1.75
RES0603 [mm]
  rect 1x1 smd: 1(-0.85,0) 2(0.85,0)
  silkscreen extent -0.15,-0.4 0.15,0.4, body extent -0.9,-0.45 0.9,0.45, height 0.55
RES2512 [mm]
  rect 2x3.3 smd: 1(-3.1,0) 2(3.1,0)
  silkscreen extent -1.5,-1.55 1.5,1.55, body extent -3.15,-1.58 3.15,1.57, height 0.7
S1M-E3/5AT [mm] "S1M-E3/5AT"
  rect 2.35x1.55 smd: 1(-1.975,0) 2(1.975,0)
  silkscreen extent -3.42,-1.4 2.65,1.45, body extent -2.64,-1.4 2.64,1.39, height 2.29
SMBJ5.0A [mm]
  rect 2.35x2.2 smd: 1(-2.8,0) 2(2.8,0)
  silkscreen extent -3.57,-2 2.8,2, body extent -2.8,-1.97 2.79,1.97, height 2.44
SOIC16 [mm] "Small Outline; 16 Leads; Body Width 3.9 mm; Pitch 1.27 mm"
  rect 0.6x2.2 smd: 1(-4.445,-2.6) 2(-3.175,-2.6) 3(-1.905,-2.6) 4(-0.635,-2.6) 5(0.635,-2.6) 6(1.905,-2.6) 7(3.175,-2.6) 8(4.445,-2.6) 9(4.445,2.6) 10(3.175,2.6) 11(1.905,2.6) 12(0.635,2.6) 13(-0.635,2.6) 14(-1.905,2.6) 15(-3.175,2.6) 16(-4.445,2.6)
  silkscreen extent -5.42,-2.72 5,1.1
SW712 [mm] "SM712 Series 600W Asymmetrical TVS Diode Array"
  rect 1.6x0.6 smd: 1(-0.9,0.95) 2(-0.9,-0.95) 3(0.9,0)
  silkscreen extent -1.03,-1.5 0.7,1.92, body extent -0.7,-1.52 0.7,1.52, height 1.12

## Part data
C1 C2 C4 C5 C6 C7 C9_REG1 C9_REG2 C9_REG3 C12 C13 C14: library part C0.1UF, "Capacitores cerámicos de capas múltiples (MLCC) - SMD/SMT 0603 0.1uF 16volts X7R 5%"
C3 C8: "Capacitores cerámicos de capas múltiples (MLCC) - SMD/SMT 0603 18pF 50volts C0G 5%"
C10: "Capacitores de polímero orgánico de aluminio 100uF 25volts 6.3x7.7mm"
C11: "Capacitores de polímero orgánico de aluminio 25volts 47uF ESR 30mohm"
D1: "Secuencias de diodos de TVS 600W 2 Channel Green Asymmetrical SOT23-3 (- 7 V to + 12 V)"
D2 D3 D4 D14: "LED estándar - SMD (montaje superficial) WL-SMCW SMDMono TpVw Waterclr 0603 Yellow"
D5_Row1 D5_Row2 D5_Row3 D5_Row4 D5_Row5 D5_Row6 D5_Row7 D6_Row1 D6_Row2 D6_Row3 D6_Row4 D6_Row5 D6_Row6 D6_Row7 D7_Row1 D7_Row2 D7_Row3 D7_Row4 D7_Row5 D7_Row6 D7_Row7 D8_Row1 D8_Row2 D8_Row3 D8_Row4 D8_Row5 D8_Row6 D8_Row7 D9_Row1 D9_Row2 D9_Row3 D9_Row4 D9_Row5 D9_Row6 D9_Row7 D10_Row1 D10_Row2 D10_Row3 D10_Row4 D10_Row5 D10_Row6 D10_Row7 D11_Row1 D11_Row2 D11_Row3 D11_Row4 D11_Row5 D11_Row6 D11_Row7 D17_Row1 D17_Row2 D17_Row3 D17_Row4 D17_Row5 D17_Row6 D17_Row7 D18_Row1 D18_Row2 D18_Row3 D18_Row4 D18_Row5 D18_Row6 D18_Row7 D19_Row1 D19_Row2 D19_Row3 D19_Row4 D19_Row5 D19_Row6 D19_Row7 D20_Row1 D20_Row2 D20_Row3 D20_Row4 D20_Row5 D20_Row6 D20_Row7 D21_Row1 D21_Row2 D21_Row3 D21_Row4 D21_Row5 D21_Row6 D21_Row7 D22_Row1 D22_Row2 D22_Row3 D22_Row4 D22_Row5 D22_Row6 D22_Row7 D23_Row1 D23_Row2 D23_Row3 D23_Row4 D23_Row5 D23_Row6 D23_Row7 D24_Row1 D24_Row2 D24_Row3 D24_Row4 D24_Row5 D24_Row6 D24_Row7 D25_Row1 D25_Row2 D25_Row3 D25_Row4 D25_Row5 D25_Row6 D25_Row7 D26_Row1 D26_Row2 D26_Row3 D26_Row4 D26_Row5 D26_Row6 D26_Row7 D27_Row1 D27_Row2 D27_Row3 D27_Row4 D27_Row5 D27_Row6 D27_Row7 D28_Row1 D28_Row2 D28_Row3 D28_Row4 D28_Row5 D28_Row6 D28_Row7 D29_Row1 D29_Row2 D29_Row3 D29_Row4 D29_Row5 D29_Row6 D29_Row7 D30_Row1 D30_Row2 D30_Row3 D30_Row4 D30_Row5 D30_Row6 D30_Row7 D31_Row1 D31_Row2 D31_Row3 D31_Row4 D31_Row5 D31_Row6 D31_Row7 D32_Row1 D32_Row2 D32_Row3 D32_Row4 D32_Row5 D32_Row6 D32_Row7 D33_Row1 D33_Row2 D33_Row3 D33_Row4 D33_Row5 D33_Row6 D33_Row7: library part HBLED, "HBLED"
D12: "Rectificadores 1.0 Amp 1000 Volt 30A IFSM @ 8.3ms"
D13: "Rectificadores en puente 600 Volt 0.5 Amp 35 Amp IFSM"
D15: "Diodos TVS - Supresores de tensión transitoria 600W 12V 5% Uni"
D16: "Diodos TVS - Supresores de tensión transitoria 5Vr 600W 65.3A 5% UniDirectional"
J1_BUS2 J1_BUS3: library part 15-43-6233, "Conectores modulares / Conectores Ethernet 8 PCB LO PRO R/A"
P1: library part "Header 3X2", "Alojamientos de cables y cabecera 2X03P DUAL ROW"
Q1_Row1 Q1_Row2 Q1_Row3 Q1_Row4 Q1_Row5 Q1_Row6 Q1_Row7: "Transistores Darlington PNP Silicon Darl"
R1 R2 R3 R4 R5 R8: "Resistores de película gruesa - SMD 1/10watt 4.7Kohms 1%"
R6_Row1 R6_Row2 R6_Row3 R6_Row4 R6_Row5 R6_Row6 R6_Row7 R7_Row1 R7_Row2 R7_Row3 R7_Row4 R7_Row5 R7_Row6 R7_Row7 R9 R10 R11 R12 R13 R14 R15 R16 R17 R18 R19 R20 R21 R22 R23 R24 R25 R26 R27 R28 R29 R30 R31 R32: "Resistores de película gruesa - SMD 1watt 470ohms 5%"
S1: "Switch"
U1: "Low-Power, Slew-Rate-Limited RS-485/RS-422 Transceiver"
U2: "20 MHz 8-bit AVR Microcontroller with 128KB Flash, 44-Pin TQFP Pkg, Industrial Temp"
U3_REG1 U3_REG2 U3_REG3: library part "TPIC6C595DR / NPIC6C595D", "Registros de cambio de contadores 8bit Shift"
U4: "Reguladores de tensión lineal 5V 1A Postive"
U5: "Codificadores, decodificadores, multiplexores y demultiplexores BCD-To-Decimal Decoders/Drivers"
Y1: "Cristales 20MHz 16pF -10C +70C"

## Free pads (board coordinates)
  oct 250x250 hole 125: 0(6460.67,884.25) 0(6460.67,7695.28) 0(12444.92,884.25) 0(12444.92,7695.28)
  round 250 hole 125: 0(11117.36,20196.85) 0(11117.36,27007.87) 0(17101.61,20196.85) 0(17101.61,27007.87) 0(31889.76,19586.61) 0(31889.76,26397.64) 0(37874.02,19601.61) 0(37874.02,26397.64)
  round 39.37 smd far side mask+39.37: 1(5140,6700) 1(5160,1020) 1(17110,1360) 1(17240,7240)
  round 39.37 smd mask+39.37: 1(5160,1020) 1(17110,1360) 1(17240,7240)
  round 39.37 smd mask+29.53: 1(15986.69,3375.04) 1(16517.72,2843.03)

## Via types
v1: diameter 50, hole 28, Top Layer to Bottom Layer, 96 vias
v2: diameter 50, hole 27.99, Top Layer to Bottom Layer, 1 vias

## Nets (pads, with @x,y where several pads share a name; then routed paths per layer and width w, separated by ;. In a path a pad name is that pad's centre, name@x,y a point inside that pad or via, vN(x,y) a via of type N, cw(c..) or ccw(c..) an arc to the next point about the centre after c; other vN are vias at no path point)
20MHZ_1: C3.1 U2.8 Y1.2 | length 866.9
  Top Layer w15: U2.8@16474.25,3172.09 16595.75,3172.09 16675.71,3252.05 16675.71,3517.05 16737.56,3578.9 16938.86,3578.9 16970.71,3547.05 C3.1@16970.71,3513.54
20MHZ_2: C8.1 U2.7 Y1.1 | length 561.6
  Top Layer w15: U2.7@16474.25,3140.59 16674.25,3140.59 16720.71,3187.05 Y1.1@16810.71,3187.05 16940.71,3187.05 16970.71,3217.05 C8.1@16970.71,3250.55
A: D1.1 J1_BUS2.4 J1_BUS3.4 U1.6 | length 3210.3
  Top Layer w15: U1.6@15875.71,4306.54 15875.71,4362.05 15920.71,4407.05 16162.87,4407.05 16262.87,4307.05 16670.71,4307.05 D1.1@16763.31,4399.65 ; J1_BUS2.4@17123.54,5250.43 17079.09,5250.43 17050.71,5222.05 17050.71,4947.05 17180.71,4817.05 17520.71,4817.05 17595.71,4742.05 17595.71,4572.05 17540.71,4517.05 17420.71,4517.05 17290.71,4387.05 J1_BUS3.4@17133.64,4387.05
  Top Layer w25: 16745.71,4377.04 16840.71,4377.04
  Top Layer w30: D1.1@16763.31,4399.65 17033.15,4399.65 17045.75,4387.05 J1_BUS3.4@17133.64,4387.05
B: D1.2 J1_BUS2.6 J1_BUS3.6 U1.7 | length 2920
  Top Layer w15: U1.7@15825.71,4306.54 15825.71,4377.05 15920.71,4472.05 16160.71,4472.05 16265.71,4577.05 16660.71,4577.05 16740.71,4497.05 ; J1_BUS2.6@17123.54,5350.43 17059.09,5350.43 16990.71,5282.05 16990.71,4887.05 17130.71,4747.05 17280.71,4747.05 17345.71,4682.05 17345.71,4547.05 17285.71,4487.05 J1_BUS3.6@17135.71,4487.05
  Top Layer w25: 16740.71,4497.05 16815.71,4497.05
  Top Layer w30: D1.2@16763.31,4474.45 17033.11,4474.45 17045.71,4487.05 J1_BUS3.6@17135.71,4487.05
CLK: P1.3 U2.3 U3_REG1.15 U3_REG2.15 U3_REG3.15 | length 11881.1
  Top Layer w15: U3_REG2.15@7525.47,1211.5 7525.47,1140.99 v2(7590.47,1075.98) ; U3_REG1.15@10990.04,1211.5 10990.04,1140.99 v1(11055.04,1075.99) ; U3_REG3.15@14454.61,1211.5 14454.61,1140.98 v1(14519.61,1075.98) ; U2.3@16474.25,3014.61 16568.15,3014.61 16910.71,2672.05 16910.71,2422.05 P1.3@16860.71,2372.05
  Bottom Layer w15: v2(7590.47,1075.98) 8048.74,1075.99 8171.34,1198.58 ; 10315.91,1198.58 10438.5,1075.99 11513.31,1075.99 11785.91,1348.58 ; 13630.47,1348.58 13903.07,1075.98 14977.88,1075.98 15100.47,1198.58 ; 16304.7,1201.04 16860.71,1757.05 P1.3@16860.71,2372.05
  Bottom Layer w50: 8171.34,1200 10315.91,1200 ; 11785.91,1348.58 13630.47,1348.58 ; 15100.47,1200 16305.74,1200
COM_485_EN: R1.1 U1.2 U1.3 U2.14 | length 1545.3
  Top Layer w15: U1.2@15825.71,4117.56 U1.3@15875.71,4117.56 15875.71,4037.05 15855.71,4017.05 R1.1@15855.71,3945.51 15887.24,3945.51 15915,3917.76 15915,3792.76 16040.71,3667.05 16490.71,3667.05 16535.71,3622.05 16535.71,3522.05 16510.71,3497.05 16410.71,3497.05 16345.71,3432.05 U2.14@16345.71,3331.54
DI: R3.2 U1.4 U2.10 | length 1629.7
  Top Layer w15: U1.4@15925.71,4117.56 15925.71,4052.05 15960.71,4017.05 16015.71,4017.05 16050.71,3982.05 R3.2@16050.71,3945.51 15994.17,3945.51 15975.71,3927.05 15975.71,3812.05 16065.71,3722.05 16515.71,3722.05 16580.71,3657.05 16580.71,3272.05 16543.74,3235.08 U2.10@16474.25,3235.08
DOUT0: U3_REG1.2 U3_REG3.9 | length 3434
  Top Layer w15: U3_REG1.2@10990.04,1400.47 10990.04,1462.72 11015.91,1488.58 11185.91,1488.58 v1(11225.91,1528.58) ; v1@14069.22,1381.64 14071.26,1379.27 14154.61,1282.58 U3_REG3.9@14154.61,1211.5
  Bottom Layer w15: v1(11225.91,1528.58) 11485.91,1528.58 ; 13786.38,1528.58 13936.38,1378.58 v1(14070.47,1378.58)
  Bottom Layer w50: 11485.91,1528.58 13786.38,1528.58
DOUT1: U3_REG1.9 U3_REG2.2 | length 3434
  Top Layer w15: U3_REG2.2@7525.47,1400.47 7525.47,1462.72 7551.34,1488.58 7721.34,1488.58 v1(7761.34,1528.58) ; v1@10604.65,1381.64 10606.7,1379.27 10690.04,1282.59 U3_REG1.9@10690.04,1211.5
  Bottom Layer w15: v1(7761.34,1528.58) 8021.34,1528.58 8171.34,1378.58 ; 10371.91,1378.58 v1(10605.91,1378.58)
  Bottom Layer w50: 8171.34,1380 10371.91,1380
DOUT2: U3_REG2.9 | length 201.9
  Top Layer w15: v1@7140.08,1381.64 7142.13,1379.27 7225.47,1282.59 U3_REG2.9@7225.47,1211.5
  other v1: 7141.34,1378.58
EXTSUPP_Row1: C10.1 C12.1 D12.1 D13.4 D15.1 Q1_Row1.3 Q1_Row2.3 Q1_Row3.3 Q1_Row4.3 Q1_Row5.3 Q1_Row6.3 Q1_Row7.3 R6_Row1.1 R6_Row2.1 R6_Row3.1 R6_Row4.1 R6_Row5.1 R6_Row6.1 R6_Row7.1 U4.1 | length 16850.6
  Top Layer w15: C12.1@16460.71,6203.54 16517.2,6203.54 16595.71,6282.05 C10.1@16660.71,6282.05
  Top Layer w50: Q1_Row1.3@5874.17,6654.45 5874.17,6837.17 5937,6900 16485,6900 16660.71,6724.29 C10.1@16660.71,6287.05 ; R6_Row1.1@6514.72,6617.05 6514.72,6885 ; Q1_Row2.3@7173.39,6654.45 7173.39,6885 ; R6_Row2.1@7813.94,6617.05 7813.94,6885 ; Q1_Row3.3@8472.6,6654.45 8472.6,6885 ; R6_Row3.1@9113.15,6617.05 9113.15,6885 ; Q1_Row4.3@9771.81,6654.45 9771.81,6885 ; R6_Row4.1@10412.36,6617.05 10412.36,6885 ; Q1_Row5.3@11071.02,6654.45 11071.02,6885 ; R6_Row5.1@11711.57,6617.05 11711.57,6885 ; Q1_Row6.3@12370.24,6654.45 12370.24,6885 ; R6_Row6.1@13010.79,6617.05 13010.79,6885 ; Q1_Row7.3@13669.45,6654.45 13669.45,6885 ; R6_Row7.1@14310,6617.05 14310,6885 ; D15.1@16220.71,5787.28 16220.71,5857.05 16255.71,5892.05 16380.71,5892.05 16420.71,5852.05 16420.71,5717.05 16447.2,5690.55 16599.21,5690.55 16658.15,5749.49 16658.15,5884.49 16755.71,5982.05 16755.71,6242.05 16715.71,6282.05 C10.1@16660.71,6282.05 ; 16300.71,6832.05 U4.1@16300.87,6331.5
GND: C1.2 C2.2 C3.2 C4.2 C5.2 C6.2 C7.2 C8.2 C9_REG1.2 C9_REG2.2 C9_REG3.2 C10.2 C11.2 C12.2 C13.2 C14.2 D1.3 D13.3 D15.2 D16.2 P1.6 R1.2 R8.2 S1.2 U1.5 U2.6 U2.18 U2.28 U2.39 U3_REG1.8 U3_REG1.16 U3_REG2.8 U3_REG2.16 U3_REG3.8 U3_REG3.16 U4.4 U5.8 | length 1127.3
  Top Layer w10: 16610.71,4422.05 16625.71,4437.05 D1.3@16692.44,4437.05
  Top Layer w15: U1.5@15925.71,4306.54 v1@16050.71,4306.54 ; 15940.71,3109.1 16093.66,3109.1 16110.71,3092.05 ; 16205.71,3407.05 16219.91,3392.84 16219.91,3231.25 ; 16251.81,3032.05 16251.81,2800.95 16260.71,2792.05 ; 16395.71,3137.05 16423.66,3109.1 16643.66,3109.1 16680.71,3072.05
  other v1: 7081.34,1458.58 10545.91,1458.58 14010.47,1458.58 16670.71,1702.05 17048.11,2549.61 16220.71,2602.05 16620.71,2622.05 16970.71,3092.05 15708,3128 15805,3270 17070.71,3392.05 16450.71,3422.05 16350.71,3572.05 15800.71,3772.05 16260.71,3832.05 16030.71,4082.05 16050.71,4307.05 16510.71,4437.05 16410,5320 16510,5320 16610,5320 16310.71,5322.05 16410,5420 16510,5420 16610,5420 16310.71,5422.05 15660.71,5827.05 16860.71,5972.05 16960.71,5972.05 16160.71,6022.05 16260.71,6022.05 16860.71,6072.05 16960.71,6072.05 16160.71,6122.05 16260.71,6122.05 15455,6445 15555,6445 15455,6545 15555,6545
IND: R5.1 U2.22 | length 620.8
  Top Layer w15: R5.1@15650.71,3458.58 15650.71,3417.05 15680.71,3387.05 15833.71,3387.05 15901.71,3455.05 16045.71,3455.05 16094.33,3406.43 U2.22@16094.33,3331.54
INPUT: P1.1 U2.1 U3_REG3.2 | length 3902
  Top Layer w15: U3_REG3.2@14454.61,1400.47 14454.61,1462.72 14480.47,1488.58 14650.47,1488.58 v1(14690.47,1528.58) ; U2.1@16474.25,2951.62 16526.14,2951.62 16810.71,2667.05 16810.71,2422.05 P1.1@16760.71,2372.05
  Bottom Layer w15: v1(14690.47,1528.58) 14950.47,1528.58 15100.47,1378.58 ; 16219.33,1380.67 16760.71,1922.05 P1.1@16760.71,2372.05
  Bottom Layer w50: 15100.47,1380 16219.33,1380
MISO: P1.4 U2.2 | length 715.4
  Top Layer w15: U2.2@16474.25,2983.11 16544.64,2983.11 16862.28,2665.47 P1.4@16862.28,2469.68
NetD2_1: D2.1 R2.1 | length 98
  Top Layer w15: D2.1@15657.68,3878.58 R2.1@15755.71,3878.58
NetD3_1: D3.1 R3.1 | length 98
  Top Layer w15: R3.1@16050.71,3878.58 D3.1@16148.74,3878.58
NetD4_1: D4.1 R5.2 | length 146.9
  Top Layer w15: R5.2@15650.71,3525.51 15672.24,3525.51 15737.2,3460.55 D4.1@15770.71,3460.55
NetD14_1: D14.1 R8.1 | length 98
  Top Layer w15: R8.1@15667.68,5640.55 D14.1@15765.71,5640.55
NetQ1_Row1_1: Q1_Row1.1 R7_Row1.2 | length 469.7
  Top Layer w30: Q1_Row1.1@6055.28,6654.45 6055.28,6745.55 6104.72,6795 6214.72,6795 6264.72,6745 R7_Row1.2@6264.72,6617.05
NetQ1_Row2_1: Q1_Row2.1 R7_Row2.2 | length 469.7
  Top Layer w30: Q1_Row2.1@7354.49,6654.45 7354.49,6745.55 7403.94,6795 7513.94,6795 7563.94,6745 R7_Row2.2@7563.94,6617.05
NetQ1_Row3_1: Q1_Row3.1 R7_Row3.2 | length 469.7
  Top Layer w30: Q1_Row3.1@8653.7,6654.45 8653.7,6745.55 8703.15,6795 8813.15,6795 8863.15,6745 R7_Row3.2@8863.15,6617.05
NetQ1_Row4_1: Q1_Row4.1 R7_Row4.2 | length 469.7
  Top Layer w30: Q1_Row4.1@9952.91,6654.45 9952.91,6745.55 10002.36,6795 10112.36,6795 10162.36,6745 R7_Row4.2@10162.36,6617.05
NetQ1_Row5_1: Q1_Row5.1 R7_Row5.2 | length 469.7
  Top Layer w30: Q1_Row5.1@11252.13,6654.45 11252.13,6745.55 11301.57,6795 11411.57,6795 11461.57,6745 R7_Row5.2@11461.57,6617.05
NetQ1_Row6_1: Q1_Row6.1 R7_Row6.2 | length 469.7
  Top Layer w30: Q1_Row6.1@12551.34,6654.45 12551.34,6745.55 12600.79,6795 12710.79,6795 12760.79,6745 R7_Row6.2@12760.79,6617.05
NetQ1_Row7_1: Q1_Row7.1 R7_Row7.2 | length 469.7
  Top Layer w30: Q1_Row7.1@13850.55,6654.45 13850.55,6745.55 13900,6795 14010,6795 14060,6745 R7_Row7.2@14060,6617.05
NetR9_2: R9.2 U3_REG3.3 | length 777
  Top Layer w15: U3_REG3.3@14404.61,1400.47 14404.61,1480.98 14462.21,1538.58 14590.47,1538.58 14650.47,1598.58 14910,1598.58
  Top Layer w20: 14910,1600 14960.63,1650.63 R9.2@14960.63,1721.42
NetR10_2: R10.2 U3_REG1.3 | length 777
  Top Layer w15: U3_REG1.3@10940.04,1400.47 10940.04,1480.99 10997.64,1538.58 11125.91,1538.58 11185.91,1598.58 11445.43,1598.58
  Top Layer w20: 11445.43,1600 11496.06,1650.63 R10.2@11496.06,1721.42
NetR11_2: R11.2 U3_REG3.4 | length 408.5
  Top Layer w15: U3_REG3.4@14354.61,1400.47 14354.61,1512.72 14430.47,1588.58 14467.32,1588.58
  Top Layer w20: 14467.32,1589.92 14517.4,1640 R11.2@14517.4,1721.34
NetR12_2: R12.2 U3_REG1.4 | length 408.5
  Top Layer w15: U3_REG1.4@10890.04,1400.47 10890.04,1512.72 10965.91,1588.58 11002.76,1588.58
  Top Layer w20: 11002.76,1589.92 11052.83,1640 R12.2@11052.83,1721.34
NetR13_2: R13.2 U3_REG3.5 | length 451
  Top Layer w15: 14154.53,1589.45 14229.61,1589.45 14304.61,1514.45 U3_REG3.5@14304.61,1400.47
  Top Layer w20: R13.2@14094.49,1721.42 14094.49,1650.47 14154.53,1590.43
NetR14_2: R14.2 U3_REG1.5 | length 451
  Top Layer w15: 10689.96,1589.45 10765.04,1589.45 10840.04,1514.45 U3_REG1.5@10840.04,1400.47
  Top Layer w20: R14.2@10629.92,1721.42 10629.92,1650.48 10689.96,1590.44
NetR15_2: R15.2 U3_REG3.6 | length 808.1
  Top Layer w15: 13990.47,1538.58 14187.01,1538.58 14254.61,1470.98 U3_REG3.6@14254.61,1400.47
  Top Layer w20: R15.2@13661.42,1721.42 13661.42,1651.03 13712.44,1600 ; 13712.44,1598.58 13930.47,1598.58 13990.47,1538.58
NetR16_2: R16.2 U3_REG1.6 | length 808.1
  Top Layer w15: 10525.91,1538.58 10722.44,1538.58 10790.04,1470.99 U3_REG1.6@10790.04,1400.47
  Top Layer w20: R16.2@10196.85,1721.42 10196.85,1651.03 10247.87,1600 ; 10247.87,1598.58 10465.91,1598.58 10525.91,1538.58
NetR17_2: R17.2 U3_REG3.11 | length 1572.1
  Top Layer w15: 13827.97,1531.08 14007.97,1351.08 14007.97,1141.08 14080.47,1068.58 14200.47,1068.58 14254.61,1122.72 U3_REG3.11@14254.61,1211.5
  Top Layer w20: R17.2@13228.35,1721.42 13228.35,1651.03 13279.37,1600 13529.92,1600 13598.84,1531.08 13827.97,1531.08
NetR18_2: R18.2 U3_REG1.11 | length 1572.1
  Top Layer w15: 10363.41,1531.08 10543.41,1351.08 10543.41,1141.08 10615.91,1068.58 10735.91,1068.58 10790.04,1122.72 U3_REG1.11@10790.04,1211.5
  Top Layer w20: R18.2@9763.78,1721.42 9763.78,1651.03 9814.8,1600 10065.35,1600 10134.27,1531.08 10363.41,1531.08
NetR19_2: R19.2 U3_REG3.12 | length 2113.4
  Top Layer w15: 13811.64,1478.58 13960.47,1329.75 13960.47,1118.58 14060.47,1018.58 14220.47,1018.58 14304.61,1102.72 U3_REG3.12@14304.61,1211.5
  Top Layer w20: R19.2@12793.15,1726.93 12793.15,1656.54 12884.17,1565.51 13125.27,1565.51 13212.2,1478.58 13811.64,1478.58
NetR20_2: R20.2 U3_REG1.12 | length 2113.4
  Top Layer w15: 10347.07,1478.58 10495.91,1329.75 10495.91,1118.58 10595.91,1018.58 10755.91,1018.58 10840.04,1102.72 U3_REG1.12@10840.04,1211.5
  Top Layer w20: R20.2@9328.58,1726.93 9328.58,1656.54 9419.6,1565.51 9660.71,1565.51 9747.64,1478.58 10347.07,1478.58
NetR21_2: R21.2 U3_REG3.13 | length 2644.6
  Top Layer w15: 13804.24,1415.98 13910.47,1309.75 13910.47,1098.58 14040.47,968.58 14240.47,968.58 14354.61,1082.72 U3_REG3.13@14354.61,1211.5
  Top Layer w20: R21.2@12362.2,1721.42 12362.2,1651.03 12483.23,1530 12714.88,1530 12827.48,1417.4 ; 12827.48,1415.98 13804.24,1415.98
NetR22_2: R22.2 U3_REG1.13 | length 2644.6
  Top Layer w15: 10339.67,1415.99 10445.91,1309.75 10445.91,1098.58 10575.91,968.58 10775.91,968.58 10890.04,1082.72 U3_REG1.13@10890.04,1211.5
  Top Layer w20: R22.2@8897.64,1721.42 8897.64,1651.03 9018.66,1530 9250.31,1530 9362.91,1417.4 ; 9362.91,1415.99 10339.67,1415.99
NetR23_2: R23.2 U3_REG3.14 | length 3180.9
  Top Layer w15: 13791.72,1358.58 13860.47,1289.83 13860.47,1078.58 14020.47,918.58 14260.47,918.58 14404.61,1062.72 U3_REG3.14@14404.61,1211.5
  Top Layer w20: R23.2@11929.13,1721.42 11929.13,1651.03 12080.16,1500 12310.16,1500 12450.16,1360 ; 12450.16,1358.58 13791.72,1358.58
NetR24_2: R24.2 U3_REG1.14 | length 3180.9
  Top Layer w15: 10327.16,1358.58 10395.91,1289.83 10395.91,1078.58 10555.91,918.58 10795.91,918.58 10940.04,1062.72 U3_REG1.14@10940.04,1211.5
  Top Layer w20: R24.2@8464.57,1721.42 8464.57,1651.03 8615.59,1500 8845.59,1500 8985.59,1360 ; 8985.59,1358.58 10327.16,1358.58
NetR25_2: R25.2 U3_REG2.3 | length 777
  Top Layer w15: U3_REG2.3@7475.47,1400.47 7475.47,1480.99 7533.07,1538.58 7661.34,1538.58 7721.34,1598.58 7980.87,1598.58
  Top Layer w20: 7980.87,1600 8031.5,1650.63 R25.2@8031.5,1721.42